# Altium PCB HDsEMG.PcbDoc
Units mil, origin at the board's own origin, x right, y up, seen from the top; angles counter-clockwise.
Board outline 2952.76 x 1220.47 mil, 4 copper layers (Top Layer, Layer 1, Layer 2, Bottom Layer), stack 23.756 mil thick; 159 components, 101 nets, 491 pads, 13 vias.
Unrouted connection lines stored in the file: 254.
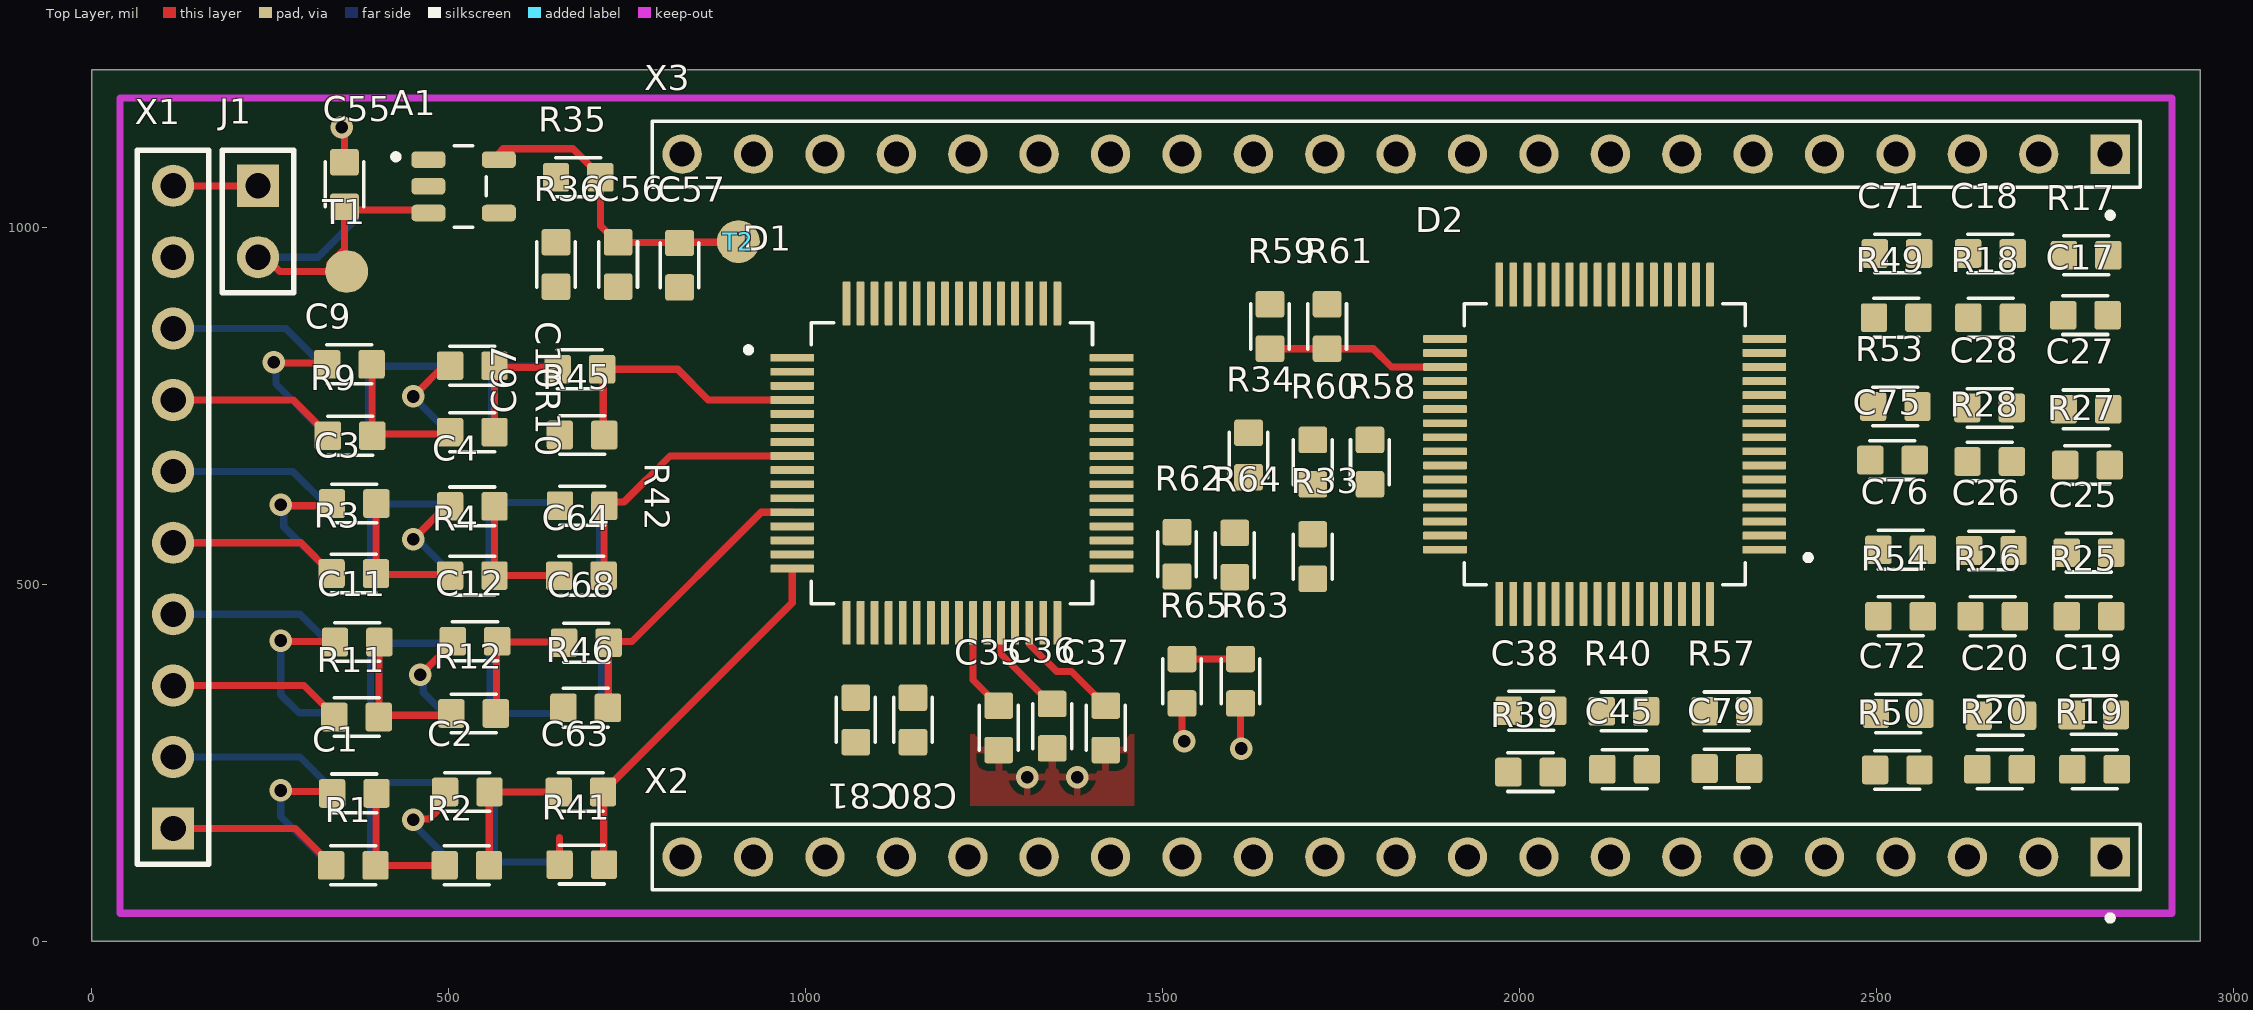
[diagram p0: Top Layer view]
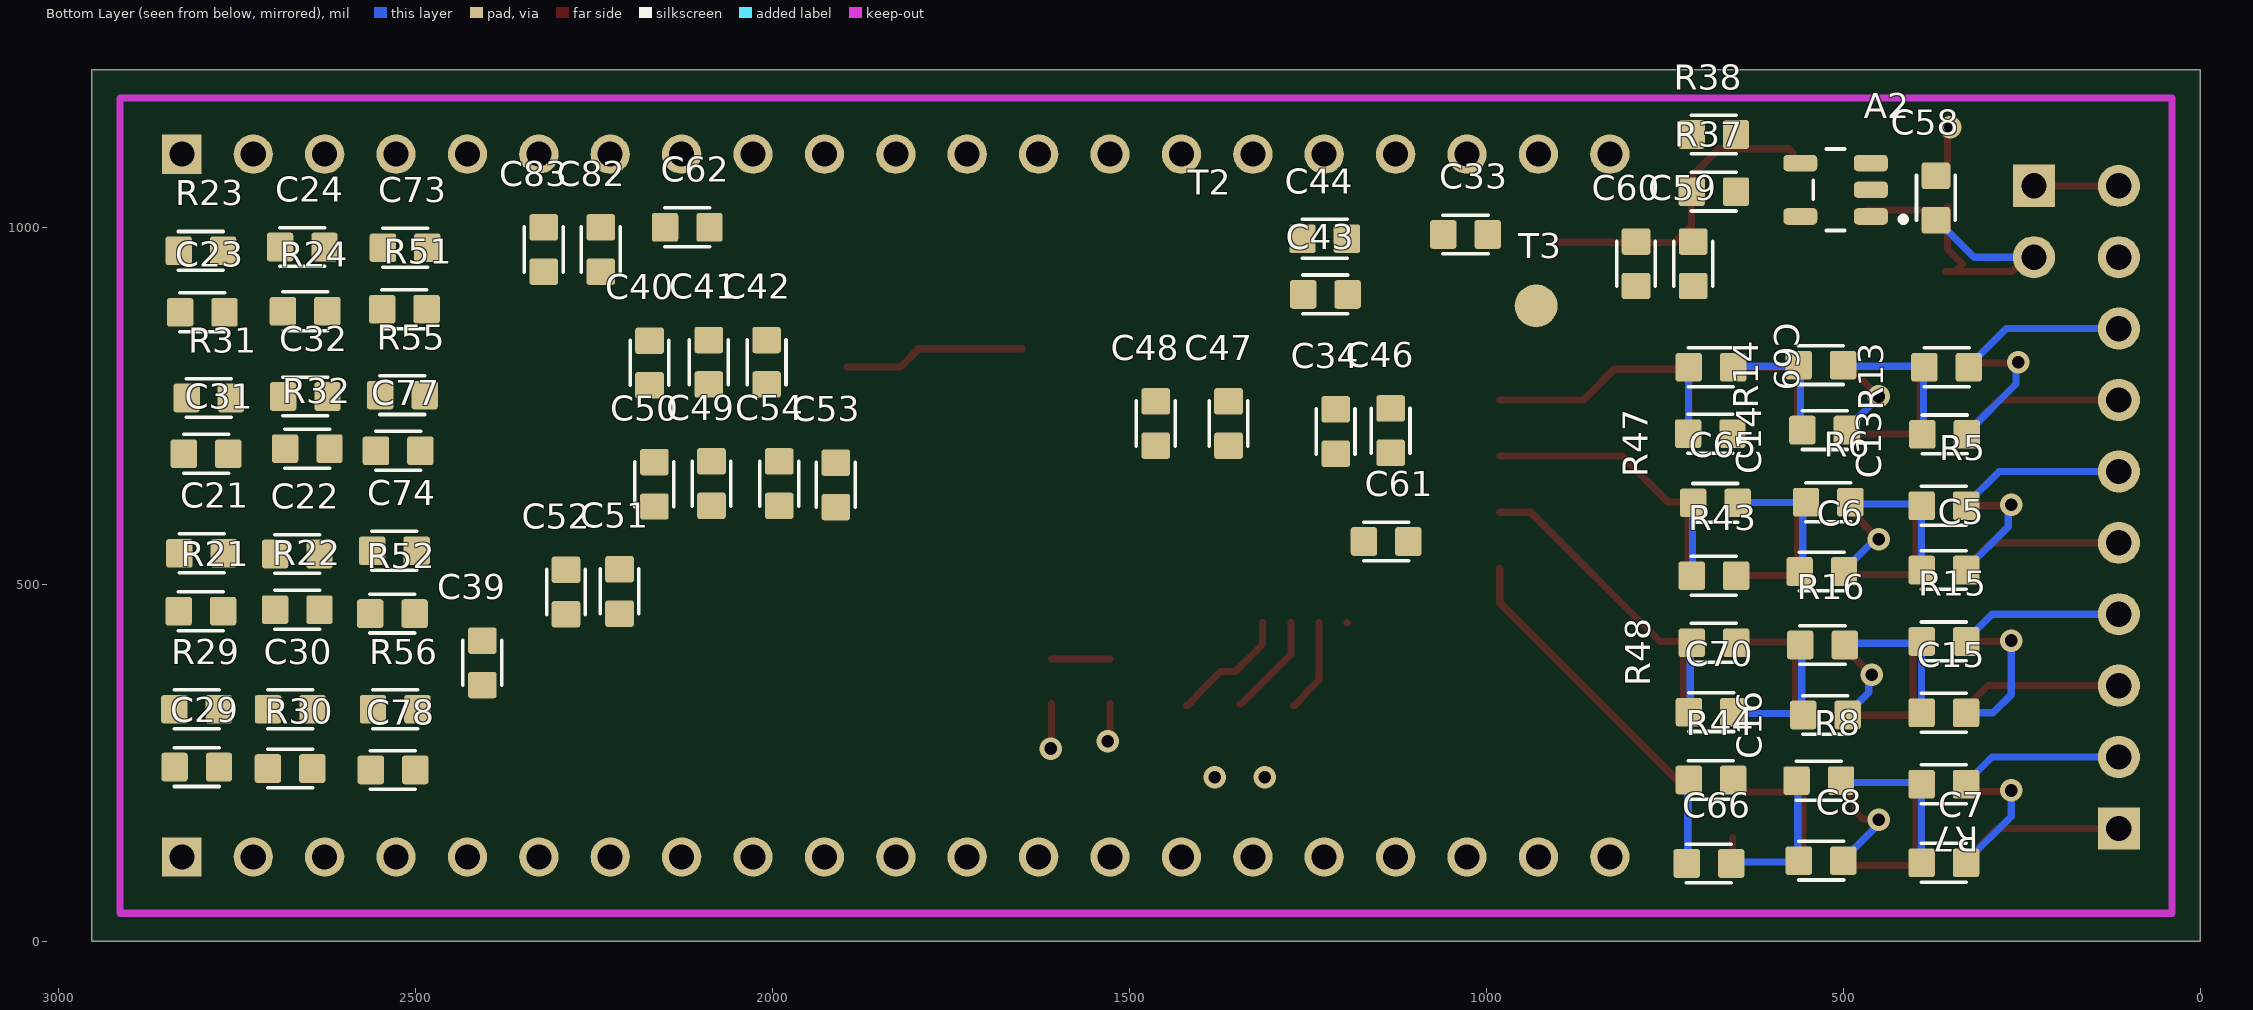
[diagram p1: Bottom Layer view, seen from below]
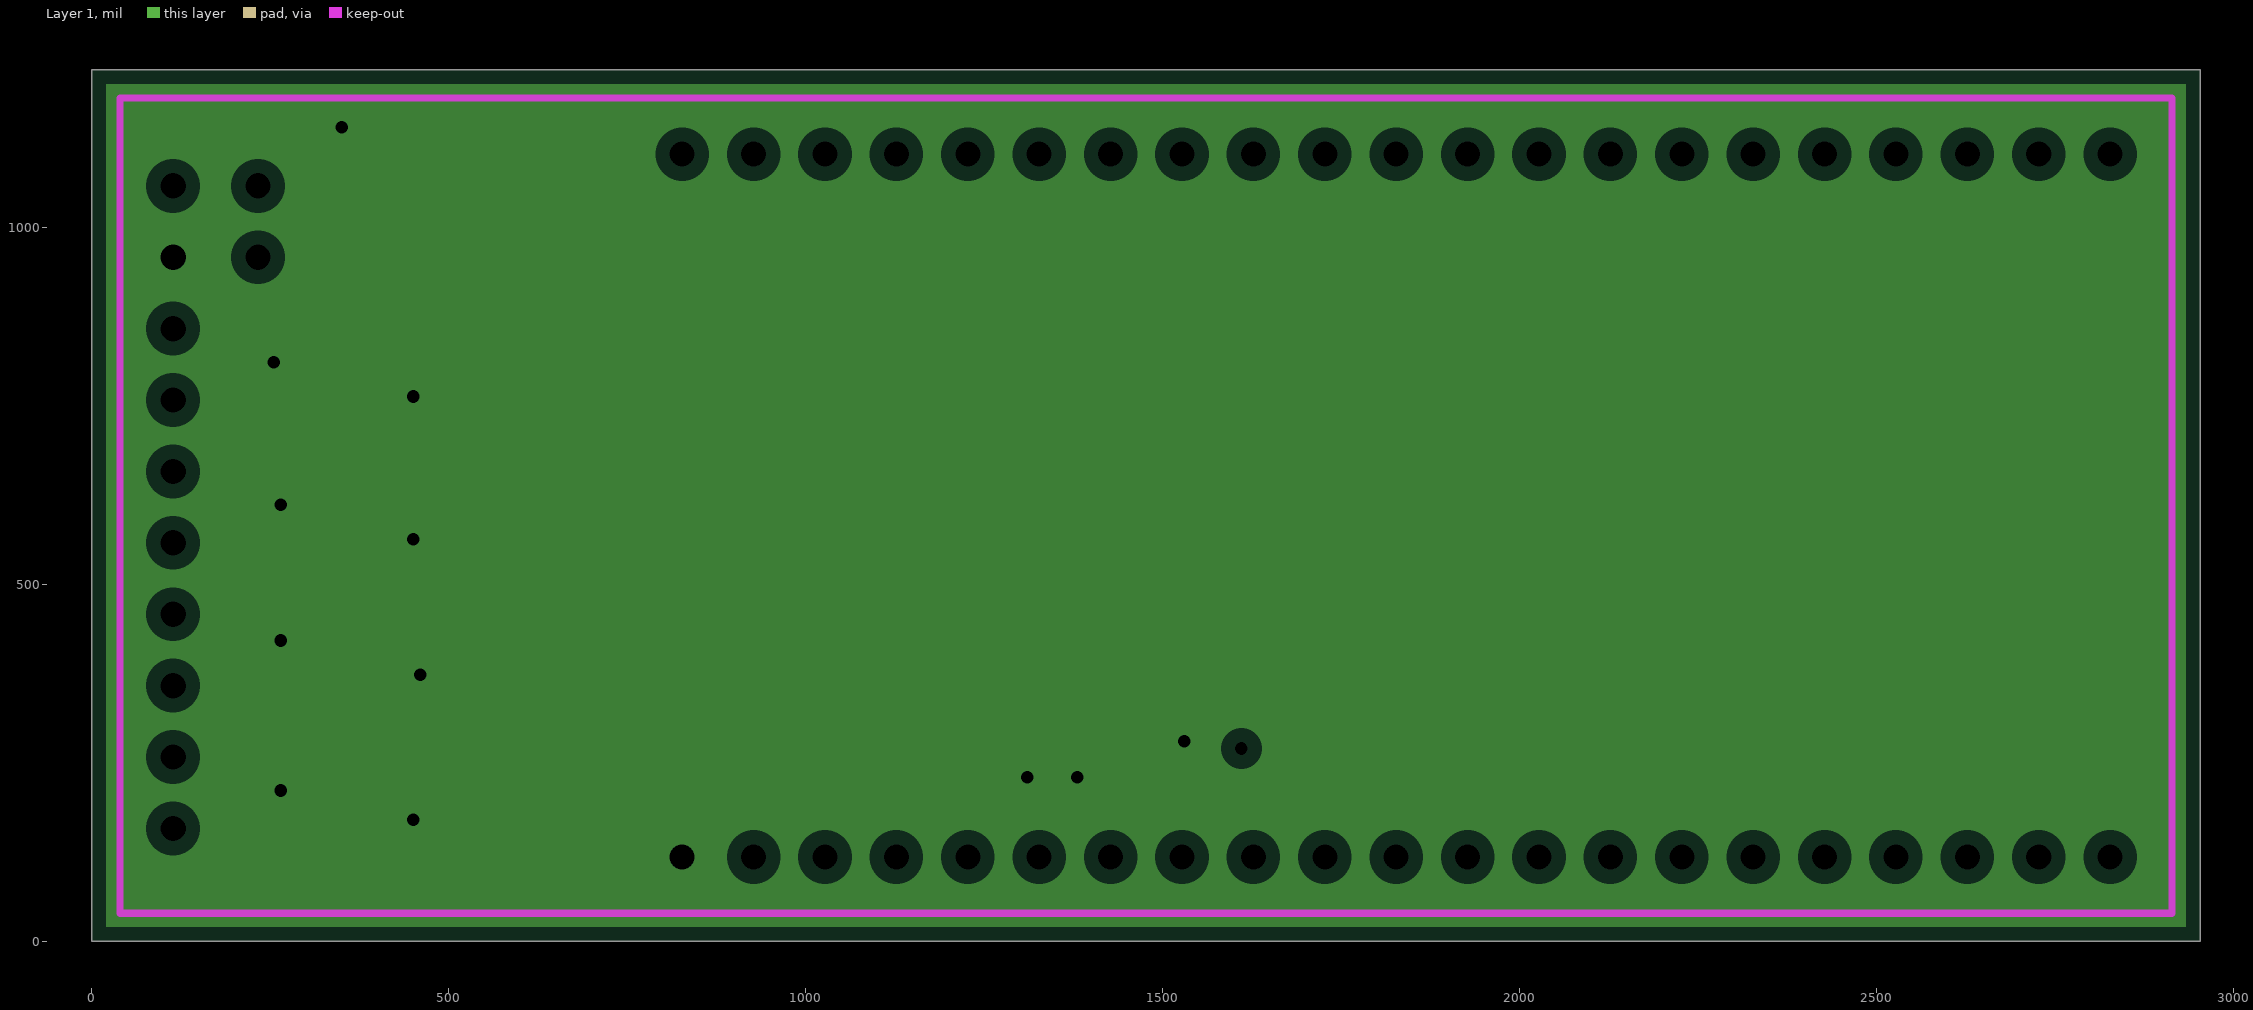
[diagram p2: Layer 1, clearances drawn from the general rule]
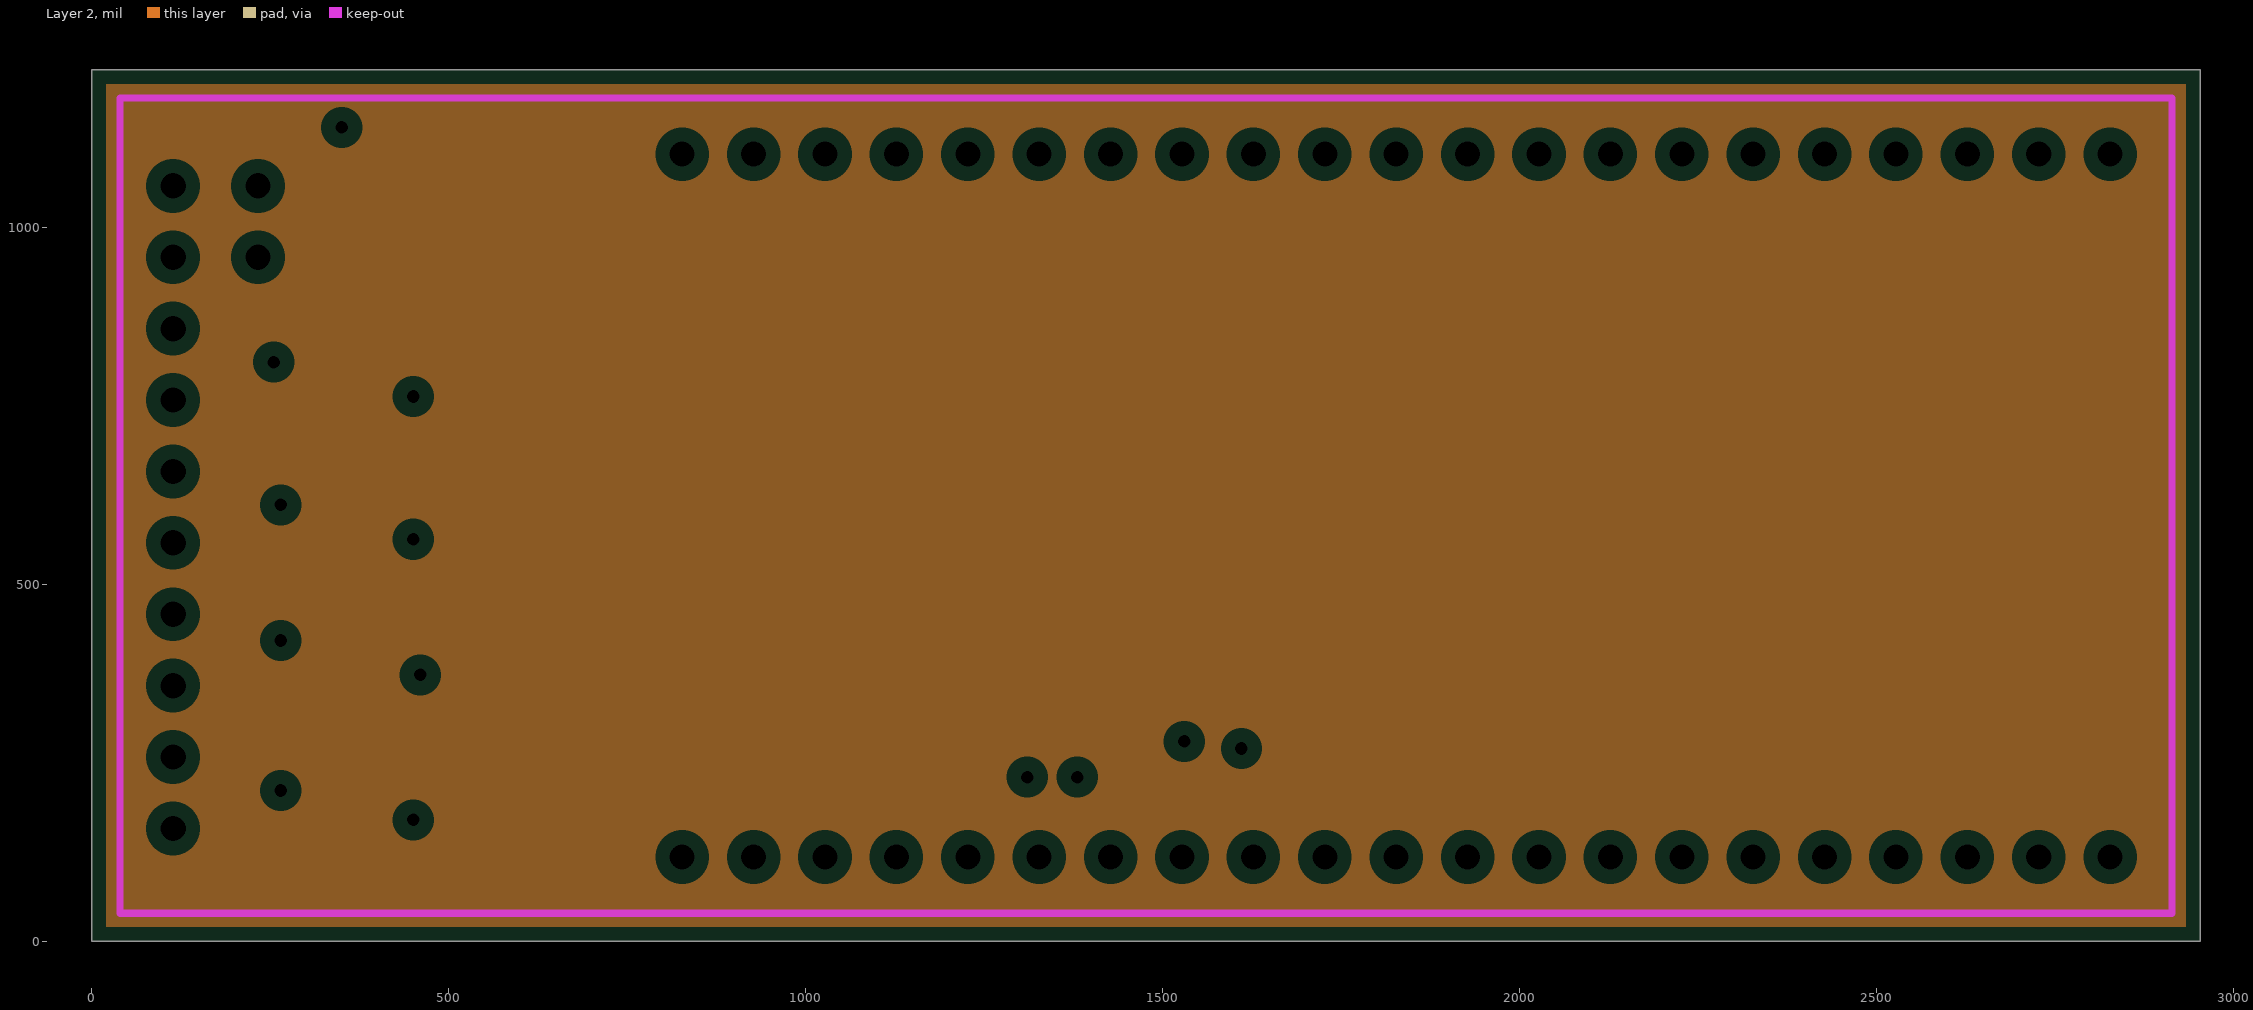
[diagram p3: Layer 2, clearances drawn from the general rule]

## Layer stack, top to bottom
Top Solder: solder mask 0.4, Solder Resist, Dk 3.5
Top Layer: signal copper 1.4
Dielectric 2: prepreg 2.8, PP-006, Dk 4.1
Layer 1: plane copper 1.378, net BAT_GND
Dielectric 1: dielectric 12.6, FR-4, Dk 4.8
Layer 2: plane copper 1.378, net AVDD
Dielectric 3: prepreg 2.8, PP-006, Dk 4.1
Bottom Layer: signal copper 1.4
Bottom Solder: solder mask 0.4, Solder Resist, Dk 3.5

## Board outline
0,0 2952.76,0 2952.76,1220.47 0,1220.47

## Design rules (kind name [scope] priority, off if disabled: settings)
Clearance [All] p1: gap=10 ignorepadtopadclearanceinfootprint=TRUE except(5: Arc-SMDPad Track-SMDPad)
PlaneClearance [All] p1: clearance=20
PlaneConnect [All] p1: planeconnectstyle=Relief reliefexpansion=20 reliefentries=4 reliefconductorwidth=10 reliefairgap=10
PolygonConnect [All] p1: connectstyle=Relief reliefconductorwidth=10 reliefentries=4 polygonreliefangle="90 Angle" airgapwidth=10
RoutingVias [All] p1: holewidth=28 width=50 viastyle="Through Hole" minholewidth=28 minwidth=50 maxholewidth=28 maxwidth=50
SolderMaskExpansion [All] p1: expansion=4 istentingtop=FALSE
Width [All] p1: maxlimit=40 minlimit=10 preferedwidth=10 minimp=50.000000 maximp=50.000000 favimp=50.000000
28 further rules are at their usual default settings.

## Classes and differential pairs
component class "Power supply": A1 A2 C55 C56 C57 C58 C59 C60 J1 R35 R36 R37 R38 T1 T2 T3
component class Input2: C17 C18 C19 C20 C21 C22 C23 C24 C25 C26 C27 C28 C29 C30 C31 C32 C38 C45 C71 C72 C73 C74 C75 C76 C77 C78 C79 R17 R18 R19 R20 R21 R22 R23 R24 R25 R26 R27 R28 R29 R30 R31 R32 R39 R40 R49 R50 R51 R52 R53 R54 R55 R56 R57
component class Input1: C1 C2 C3 C4 C5 C6 C7 C8 C9 C10 C11 C12 C13 C14 C15 C16 C63 C64 C65 C66 C67 C68 C69 C70 R1 R2 R3 R4 R5 R6 R7 R8 R9 R10 R11 R12 R13 R14 R15 R16 R41 R42 R43 R44 R45 R46 R47 R48
component class ESP32: X2 X3
component class ADS1298: C33 C34 C35 C36 C37 C39 C40 C41 C42 C43 C44 C46 C47 C48 C49 C50 C51 C52 C53 C54 C61 C62 C80 C81 C82 C83 D1 D2 R33 R34 R58 R59 R60 R61 R62 R63 R64 R65

## Components (designator, comment, footprint, x,y, rotation, side; value= is the part's Value field where it differs from the comment)
A1 "TPS73201DBVR" SOT95P280X145-5N 520.59,1057.4 r0 top
A2 "TPS73201DBVR" SOT95P280X145-5N 510.59,1052.6 r0 bottom
C1 "47pF" RESC1608X50N 367.56,207.11 r0 top value=100pF
C2 "47pF" RESC1608X50N 525.76,209.11 r0 top value=100pF
C3 "47pF" RESC1608X50N 367.35,613.11 r0 top value=100pF
C4 "47pF" RESC1608X50N 532.76,609.11 r0 top value=100pF
C5 "47pF" RESC1608X50N 358.9,520 r0 bottom value=100pF
C6 "47pF" RESC1608X50N 529.9,518 r0 bottom value=100pF
C7 "47pF" RESC1608X50N 358.9,110 r0 bottom value=100pF
C8 "47pF" RESC1608X50N 530.9,113 r0 bottom value=100pF
C9 "47pF" RESC1608X50N 360.56,808.11 r0 top value=100pF
C10 "47pF" RESC1608X50N 532.76,806.11 r0 top value=100pF
C11 "47pF" RESC1608X50N 371.56,419.11 r0 top value=100pF
C12 "47pF" RESC1608X50N 536.56,420.11 r0 top value=100pF
C13 "47pF" RESC1608X50N 357.9,710 r0 bottom value=100pF
C14 "47pF" RESC1608X50N 525.9,716 r0 bottom value=100pF
C15 "47pF" RESC1608X50N 358.9,320 r0 bottom value=100pF
C16 "47pF" RESC1608X50N 524.9,317 r0 bottom value=100pF
C17 "47pF" RESC1608X50N 2792.1,877 r180 top value=100pF
C18 "47pF" RESC1608X50N 2659.09,963.39 r180 top value=100pF
C19 "47pF" RESC1608X50N 2803.9,317 r180 top value=100pF
C20 "47pF" RESC1608X50N 2673.69,316 r180 top value=100pF
C21 "47pF" RESC1608X50N 2799.09,543.39 r0 bottom value=100pF
C22 "47pF" RESC1608X50N 2665.09,542.39 r0 bottom value=100pF
C23 "47pF" RESC1608X50N 2798.1,881 r180 bottom value=100pF
C24 "47pF" RESC1608X50N 2658.09,972.39 r180 bottom value=100pF
C25 "47pF" RESC1608X50N 2797.09,544.39 r0 top value=100pF
C26 "47pF" RESC1608X50N 2660.3,547.39 r180 top value=100pF
C27 "47pF" RESC1608X50N 2792.9,745 r180 top value=100pF
C28 "47pF" RESC1608X50N 2657.9,747 r180 top value=100pF
C29 "47pF" RESC1608X50N 2805.9,244 r180 bottom value=100pF
C30 "47pF" RESC1608X50N 2674.9,325 r180 bottom value=100pF
C31 "47pF" RESC1608X50N 2792.9,683 r180 bottom value=100pF
C32 "47pF" RESC1608X50N 2653.9,763 r180 bottom value=100pF
C33 "1nF" RESC1608X50N 1028.9,990 r180 bottom value=100pF
C34 "1uF" RESC1608X50N 1210.77,714.01 r270 bottom value=100pF
C35 "1uF" RESC1608X50N 1270,298.9 r270 top value=100pF
C36 "22uF" RESC1608X50N 1345,301.31 r270 top value=100pF
C37 "1uF" RESC1608X50N 1420,298.9 r270 top value=100pF
C38 "47pF" RESC1608X50N 2015.69,323 r0 top value=100pF
C39 "1nF" RESC1608X50N 2405.9,390 r270 bottom value=100pF
C40 "1uF" RESC1608X50N 2171.77,810.01 r270 bottom value=100pF
C41 "22uF" RESC1608X50N 2088.77,811.01 r270 bottom value=100pF
C42 "1uF" RESC1608X50N 2007.77,811.01 r270 bottom value=100pF
C43 "1uF" RESC1608X50N 1225.1,906 r180 bottom value=100pF
C44 "100nF" RESC1608X50N 1226.1,984 r180 bottom value=100pF
C45 "47pF" RESC1608X50N 2146.69,241 r0 top value=100pF
C46 "0.1uF" RESC1608X50N 1133.77,715.21 r270 bottom value=100pF
C47 "1uF" RESC1608X50N 1360.77,725.21 r90 bottom value=100pF
C48 "100nF" RESC1608X50N 1462.77,725.21 r90 bottom value=100pF
C49 "1uF" RESC1608X50N 2085,641.1 r90 bottom value=100pF
C50 "100nF" RESC1608X50N 2165,640.1 r90 bottom value=100pF
C51 "1uF" RESC1608X50N 2213.77,490.01 r90 bottom value=100pF
C52 "0.1uF" RESC1608X50N 2288.77,489.21 r90 bottom value=100pF
C53 "1uF" RESC1608X50N 1910.77,639.21 r90 bottom value=100pF
C54 "100nF" RESC1608X50N 1990,641.1 r90 bottom value=100pF
C55 "1uF" RESC1608X50N 353.77,1060.01 r270 top value=100pF
C56 "1uF" RESC1608X50N 737,947.9 r90 top value=100pF
C57 "10uF" RESC1608X50N 823,946.9 r90 top value=100pF
C58 "1uF" RESC1608X50N 370,1041.1 r270 bottom value=100pF
C59 "1uF" RESC1608X50N 710,948.9 r90 bottom value=100pF
C60 "10uF" RESC1608X50N 790,948.9 r90 bottom value=100pF
C61 "10uF" RESC1608X50N 1140,560 r0 bottom value=100pF
C62 "10uF" RESC1608X50N 2118.9,1000 r180 bottom value=100pF
C63 "330nF" RESC1608X50N 684.76,209.11 r180 top value=100pF
C64 "330nF" RESC1608X50N 685.56,512.11 r180 top value=100pF
C65 "330nF" RESC1608X50N 678.9,614 r180 bottom value=100pF
C66 "330nF" RESC1608X50N 687.9,109 r180 bottom value=100pF
C67 "330nF" RESC1608X50N 683.56,801.11 r180 top value=100pF
C68 "330nF" RESC1608X50N 692.56,418.11 r180 top value=100pF
C69 "330nF" RESC1608X50N 685.1,804 r180 bottom value=100pF
C70 "330nF" RESC1608X50N 684.9,321 r180 bottom value=100pF
C71 "330nF" RESC1608X50N 2528.3,963.39 r0 top value=100pF
C72 "330nF" RESC1608X50N 2529.9,319 r0 top value=100pF
C73 "330nF" RESC1608X50N 2514.09,971.39 r0 bottom value=100pF
C74 "330nF" RESC1608X50N 2529.1,547 r0 bottom value=100pF
C75 "330nF" RESC1608X50N 2521.9,674 r0 top value=100pF
C76 "330nF" RESC1608X50N 2533.3,548.39 r180 top value=100pF
C77 "330nF" RESC1608X50N 2523.9,687 r0 bottom value=100pF
C78 "330nF" RESC1608X50N 2531.1,240 r0 bottom value=100pF
C79 "330nF" RESC1608X50N 2289.9,242 r180 top value=100pF
C80 "1uF" RESC1608X50N 1150,310 r270 top value=100pF
C81 "100nF" RESC1608X50N 1070,310 r270 top value=100pF
C82 "1uF" RESC1608X50N 2240,968.9 r90 bottom value=100pF
C83 "100nF" RESC1608X50N 2320,968.9 r90 bottom value=100pF
D1 "ADS1298IPAG" QFP50P1200X1200X120-64N 1204.56,669.73 r0 top
D2 "ADS1298IPAG" QFP50P1200X1200X120-64N 2118.77,696.11 r180 top
J1 "Header 2" HDR1X2 232.77,1058.11 r270 top
R1 "22k1" CAPC1608X90 366.09,106.39 r0 top value=1K
R2 "10k" CAPC1608X90 525.09,106.39 r0 top value=1K
R3 "22k1" CAPC1608X90 366.76,515.11 r0 top value=1K
R4 "10k" CAPC1608X90 532.76,512.11 r0 top value=1K
R5 "22k1" CAPC1608X90 358.9,610 r0 bottom value=1K
R6 "10k" CAPC1608X90 520.9,615 r0 bottom value=1K
R7 "22k1" CAPC1608X90 358.9,220 r0 bottom value=1K
R8 "10k" CAPC1608X90 534.1,225 r0 bottom value=1K
R9 "22k1" CAPC1608X90 361.56,708.11 r0 top value=1K
R10 "10k" CAPC1608X90 532.76,713.11 r0 top value=1K
R11 "22k1" CAPC1608X90 370.76,314.11 r0 top value=1K
R12 "10k" CAPC1608X90 534.56,319.11 r0 top value=1K
R13 "22k1" CAPC1608X90 355.1,804 r0 bottom value=1K
R14 "10k" CAPC1608X90 531.1,807 r0 bottom value=1K
R15 "22k1" CAPC1608X90 358.9,420 r0 bottom value=1K
R16 "10k" CAPC1608X90 528.9,415 r0 bottom value=1K
R17 "22k1" CAPC1608X90 2793.1,961 r180 top value=1K
R18 "10k" CAPC1608X90 2659.3,873.39 r180 top value=1K
R19 "22k1" CAPC1608X90 2804.9,241 r180 top value=1K
R20 "10k" CAPC1608X90 2671.9,241 r180 top value=1K
R21 "22k1" CAPC1608X90 2800.09,462.39 r0 bottom value=1K
R22 "10k" CAPC1608X90 2665.09,464.39 r0 bottom value=1K
R23 "22k1" CAPC1608X90 2800.1,967 r180 bottom value=1K
R24 "10k" CAPC1608X90 2654.09,882.39 r180 bottom value=1K
R25 "22k1" CAPC1608X90 2797.09,455.39 r180 top value=1K
R26 "10k" CAPC1608X90 2662.3,455.39 r180 top value=1K
R27 "22k1" CAPC1608X90 2794.9,667 r180 top value=1K
R28 "10k" CAPC1608X90 2658.1,672 r180 top value=1K
R29 "22k1" CAPC1608X90 2806.1,325 r180 bottom value=1K
R30 "10k" CAPC1608X90 2675.1,242 r180 bottom value=1K
R31 "22k1" CAPC1608X90 2789.1,761 r180 bottom value=1K
R32 "10k" CAPC1608X90 2651.1,690 r180 bottom value=1K
R33 "10k" CAPC1608X90 1710,538.9 r90 top value=1K
R34 "10k" CAPC1608X90 1620,681.1 r90 top value=1K
R35 "47k7" CAPC1608X90 681.1,1070 r0 top value=1K
R36 "32k" CAPC1608X90 650,947.9 r90 top value=1K
R37 "55k7" CAPC1608X90 681.1,1050 r0 bottom value=1K
R38 "32k" CAPC1608X90 681.1,1130 r180 bottom value=1K
R39 "22k1" CAPC1608X90 2014.9,237 r0 top value=1K
R40 "10k" CAPC1608X90 2145.69,322 r0 top value=1K
R41 "47k" CAPC1608X90 686.09,107.39 r0 top value=1K
R42 "47k" CAPC1608X90 686.76,610.11 r0 top value=1K
R43 "47k" CAPC1608X90 680.9,512 r0 bottom value=1K
R44 "47k" CAPC1608X90 685.1,226 r0 bottom value=1K
R45 "47k" CAPC1608X90 686.56,709.11 r0 top value=1K
R46 "47k" CAPC1608X90 691.56,327.11 r0 top value=1K
R47 "47k" CAPC1608X90 686,711 r0 bottom value=1K
R48 "47k" CAPC1608X90 680.9,418 r0 bottom value=1K
R49 "47k" CAPC1608X90 2527.09,873.39 r180 top value=1K
R50 "47k" CAPC1608X90 2528.69,240 r180 top value=1K
R51 "47k" CAPC1608X90 2515.09,885.39 r180 bottom value=1K
R52 "47k" CAPC1608X90 2531.9,459 r180 bottom value=1K
R53 "47k" CAPC1608X90 2525.9,749 r180 top value=1K
R54 "47k" CAPC1608X90 2533.3,455.39 r0 top value=1K
R55 "47k" CAPC1608X90 2517.9,765 r180 bottom value=1K
R56 "47k" CAPC1608X90 2527.9,325 r180 bottom value=1K
R57 "47k" CAPC1608X90 2289.9,322 r0 top value=1K
R58 "10k" CAPC1608X90 1790,671.1 r270 top value=1K
R59 "10k" CAPC1608X90 1650,861.1 r90 top value=1K
R60 "10k" CAPC1608X90 1710,671.1 r90 top value=1K
R61 "10k" CAPC1608X90 1730,861.1 r270 top value=1K
R62 "10k" CAPC1608X90 1519.77,542.01 r90 top value=1K
R63 "10k" CAPC1608X90 1608.77,364.21 r270 top value=1K
R64 "10k" CAPC1608X90 1600.77,541.01 r270 top value=1K
R65 "10k" CAPC1608X90 1526.77,364.21 r90 top value=1K
T1 "TP1" PCBComponent_1#1 356.77,938.11 r0 top
T2 "TP2" PCBComponent_1#2 1393,980 r180 bottom
T3 "TP3" PCBComponent_1#1 930,890 r180 bottom
X1 "Header 10" HDR1X10 113.77,158.11 r90 top
X2 "7-2267062-1" TE_7-2267062-1 1826.77,118.11 r180 top
X3 "7-2267062-1" TE_7-2267062-1 1826.77,1102.36 r180 top

## Footprints (in the part's own frame and the unit in brackets; to place one, negate y for a bottom-side part, rotate by r counter-clockwise, add the part's x,y. Pads: shape width x height; smd on the part's side, far side on the other; paste and mask are expansions set on the pad)
CAPC1608X90 [mm]
  rrect20% 0.94x1.02 smd: 1(-0.79,0) 2(0.79,0)
  silkscreen extent -0.8,-0.69 0.8,0.69
HDR1X2 [mm] "Connector; Header; 2 Position"
  rect 1.5x1.5 hole 0.9: 1(0,0)
  round 1.5 hole 0.9: 2(2.54,0)
  silkscreen extent -1.27,-1.27 3.81,1.27
HDR1X10 [mm] "Connector; Header; 10 Position"
  rect 1.5x1.5 hole 0.9: 1(0,0)
  round 1.5 hole 0.9: 2(2.54,0) 3(5.08,0) 4(7.62,0) 5(10.16,0) 6(12.7,0) 7(15.24,0) 8(17.78,0) 9(20.32,0) 10(22.86,0)
  silkscreen extent -1.27,-1.27 24.13,1.27
PCBComponent_1#1 [mil]
  round 60 smd: 1(0,0)
PCBComponent_1#2 [mil]
  round 60 smd far side: 1(487.49,0)
QFP50P1200X1200X120-64N [mm]
  rrect25% 1.56x0.28 smd: 1(-5.68,3.75) 2(-5.68,3.25) 3(-5.68,2.75) 4(-5.68,2.25) 5(-5.68,1.75) 6(-5.68,1.25) 7(-5.68,0.75) 8(-5.68,0.25) 9(-5.68,-0.25) 10(-5.68,-0.75) 11(-5.68,-1.25) 12(-5.68,-1.75) 13(-5.68,-2.25) 14(-5.68,-2.75) 15(-5.68,-3.25) 16(-5.68,-3.75) 33(5.68,-3.75) 34(5.68,-3.25) 35(5.68,-2.75) 36(5.68,-2.25) 37(5.68,-1.75) 38(5.68,-1.25) 39(5.68,-0.75) 40(5.68,-0.25) 41(5.68,0.25) 42(5.68,0.75) 43(5.68,1.25) 44(5.68,1.75) 45(5.68,2.25) 46(5.68,2.75) 47(5.68,3.25) 48(5.68,3.75)
  rrect25% 0.28x1.56 smd: 17(-3.75,-5.68) 18(-3.25,-5.68) 19(-2.75,-5.68) 20(-2.25,-5.68) 21(-1.75,-5.68) 22(-1.25,-5.68) 23(-0.75,-5.68) 24(-0.25,-5.68) 25(0.25,-5.68) 26(0.75,-5.68) 27(1.25,-5.68) 28(1.75,-5.68) 29(2.25,-5.68) 30(2.75,-5.68) 31(3.25,-5.68) 32(3.75,-5.68) 49(3.75,5.68) 50(3.25,5.68) 51(2.75,5.68) 52(2.25,5.68) 53(1.75,5.68) 54(1.25,5.68) 55(0.75,5.68) 56(0.25,5.68) 57(-0.25,5.68) 58(-0.75,5.68) 59(-1.25,5.68) 60(-1.75,5.68) 61(-2.25,5.68) 62(-2.75,5.68) 63(-3.25,5.68) 64(-3.75,5.68)
  silkscreen extent -7.34,-5 5,5
RESC1608X50N [mm]
  rrect20% 0.94x1.02 smd: 1(-0.79,0) 2(0.79,0)
  silkscreen extent -0.8,-0.69 0.8,0.69
SOT95P280X145-5N [mm]
  rrect50% 1.21x0.59 smd: 1(-1.255,0.95) 2(-1.255,0) 3(-1.255,-0.95) 4(1.255,-0.95) 5(1.255,0.95)
  silkscreen extent -2.51,-1.45 0.8,1.45, body extent -1.4,-1.45 1.4,1.45, height 1.45
TE_7-2267062-1 [mm]
  rect 1.398x1.398 hole 0.89: 1(-25.4,0)
  round 1.398 hole 0.89: 2(-22.86,0) 3(-20.32,0) 4(-17.78,0) 5(-15.24,0) 6(-12.7,0) 7(-10.16,0) 8(-7.62,0) 9(-5.08,0) 10(-2.54,0) 11(0,0) 12(2.54,0) 13(5.08,0) 14(7.62,0) 15(10.16,0) 16(12.7,0) 17(15.24,0) 18(17.78,0) 19(20.32,0) 20(22.86,0) 21(25.4,0)
  silkscreen extent -26.47,-1.17 26.47,2.27, body extent -26.47,-1.17 26.47,1.17, height 8.08

## Part data
A1 A2: "250-mA, high-accuracy, ultra-low-dropout voltage regulator with reverse current protection & enable 5-SOT-23 -40 to 125", Package="SOT-23-5 Texas Instruments", Arrow_Electronics-Purchase-URL=https://snapeda.com/shop?store=Arrow+Electronics&id=76590, DigiKey-Purchase-URL=https://snapeda.com/shop?store=DigiKey&id=76590, MF="Texas Instruments", Mouser-Purchase-URL=https://snapeda.com/shop?store=Mouser&id=76590, MP=TPS73201DBVR, SnapEDA_Link=https://www.snapeda.com/parts/TPS73201DBVR/Texas%20Instruments/view-part/76590/?ref=snap, Texas_Instruments-Purchase-URL=https://snapeda.com/shop?store=Texas+Instruments&id=76590
C1 C2 C3 C4 C5 C6 C7 C8 C9 C10 C11 C12 C13 C14 C15 C16 C17 C18 C19 C20 C21 C22 C23 C24 C25 C26 C27 C28 C29 C30 C31 C32 C33 C34 C35 C36 C37 C38 C39 C40 C41 C42 C43 C44 C45 C46 C47 C48 C49 C50 C51 C52 C53 C54 C55 C56 C57 C58 C59 C60 C61 C62 C63 C64 C65 C66 C67 C68 C69 C70 C71 C72 C73 C74 C75 C76 C77 C78 C79 C80 C81 C82 C83: library part Cap, "Capacitor", LatestRevisionDate=17-Jul-2002, LatestRevisionNote="Re-released for DXP Platform.", PackageDescription="Radial Cap, Thru-Hole; 2 Leads; 0.3 in Pin Spacing", PackageReference=RAD-0.3, Published=8-Jun-2000, Publisher="Altium Limited"
D1 D2: "Integrated Circuit", Manufacturer_Name="Texas Instruments", Mouser Part Number=595-ADS1298IPAG, Arrow Part Number=ADS1298IPAG, Arrow Price/Stock=https://www.arrow.com/en/products/ads1298ipag/texas-instruments, Datasheet Link=http://www.ti.com/lit/ds/symlink/ads1298.pdf, Height=1.2mm, Manufacturer_Part_Number=ADS1298IPAG, Mouser Price/Stock=https://www.mouser.co.uk/ProductDetail/Texas-Instruments/ADS1298IPAG?qs=Z6FgPJT5dDR3VNlC6H4EKg%3D%3D
J1: "Header, 2-Pin", LatestRevisionDate=17-Jul-2002, LatestRevisionNote="Re-released for DXP Platform.", Publisher="Altium Limited"
R1 R2 R3 R4 R5 R6 R7 R8 R9 R10 R11 R12 R13 R14 R15 R16 R17 R18 R19 R20 R21 R22 R23 R24 R25 R26 R27 R28 R29 R30 R31 R32 R33 R34 R35 R36 R37 R38 R39 R40 R41 R42 R43 R44 R45 R46 R47 R48 R49 R50 R51 R52 R53 R54 R55 R56 R57 R58 R59 R60 R61 R62 R63 R64 R65: library part Res2, "Resistor", LatestRevisionDate=17-Jul-2002, LatestRevisionNote="Re-released for DXP Platform.", PackageDescription="Axial Device, Thru-Hole; 2 Leads; 0.4 in Pin Spacing", PackageReference=AXIAL-0.4, Published=8-Jun-2000, Publisher="Altium Limited"
T1 T2 T3: library part Component_1
X1: "Header, 10-Pin", LatestRevisionDate=17-Jul-2002, LatestRevisionNote="Re-released for DXP Platform.", Publisher="Altium Limited"
X2 X3: Package=None, Availability=Unavailable, MP=7-2267062-1, Price=None

## Via types
v1: diameter 31.5, hole 17.72, Top Layer to Bottom Layer, 13 vias

## Nets (pads, with @x,y where several pads share a name; then routed paths per layer and width w, separated by ;. In a path a pad name is that pad's centre, name@x,y a point inside that pad or via, vN(x,y) a via of type N, cw(c..) or ccw(c..) an arc to the next point about the centre after c; other vN are vias at no path point)
/CS1: D1.39 R34.1 X3.15
/CS2: D2.39 R33.1 X2.12
/PWDN1: D1.35 R63.1 R65.2 | length 82
  Top Layer w10: R65.2 R63.1
/PWDN2: D2.35 R59.1 R61.2 | length 255.8
  Top Layer w10: R59.1 R61.2 1794.7,830 1820.33,804.38 D2.35
/RESET1: D1.36 R62.1 R64.2
/RESET2: D2.36 R58.1 R60.2
AVDD: A1.5 C43.1 C44.1 C49.1 C50.1 C56.2 C57.2 C80.1 C81.1 C82.1 C83.1 D1.19 D1.21 D1.22 D1.54 D1.56 D1.59 D2.19 D2.21 D2.22 D2.54 D2.56 D2.59 R35.2 T2.1 | length 443.4
  Top Layer w10: A1.5 570,1104.14 575.86,1110 673.78,1110 712.2,1071.57 R35.2 712.2,1002.22 735.43,979 C56.2 737.5,978.5 822.5,978.5 C57.2 824,979 904.51,979 T2.1
BAT: J1.1 X1.10 | length 119
  Top Layer w10: X1.10 J1.1
BAT_GND: A1.2 A2.2 C1.1 C2.1 C3.1 C4.1 C5.1 C6.1 C7.1 C8.1 C9.1 C10.1 C11.1 C12.1 C13.1 C14.1 C15.1 C16.1 C17.1 C18.1 C19.1 C20.1 C21.1 C22.1 C23.1 C24.1 C25.1 C26.1 C27.1 C28.1 C29.1 C30.1 C31.1 C32.1 C33.2 C34.2 C35.2 C36.2 C37.2 C38.1 C39.2 C40.2 C41.2 C42.2 C43.2 C44.2 C45.1 C46.2 C49.2 C50.2 C51.2 C52.2 C55.1 C56.1 C57.1 C58.1 C59.1 C60.1 C61.1 C62.1 C80.2 C81.2 C82.2 C83.2 D1.20 D1.23 D1.25 D1.32 D1.33 D1.53 D1.57 D1.58 D2.20 D2.23 D2.25 D2.32 D2.33 D2.53 D2.57 D2.58 R36.1 R38.1 R60.1 R61.1 R64.1 R65.1 X1.9 X2.21 | length 1465.4
  Top Layer w10: v1@255.82,810 C9.1@323.57,810 ; v1(264.57,211.25) 265.82,210 333.57,210 C1.1 ; v1@265.82,420 C11.1@333.57,420 ; v1@265.82,610 C3.1@333.57,610 ; v1(350,1140) 350,1150 353.77,1146.23 C55.1 ; v1(450,170) 451.22,171.22 472.26,171.22 483.59,182.55 483.59,198.04 C2.1 ; v1(450,563.08) C4.1@495.46,608.54 ; v1(450,763.08) C10.1@495.46,808.54 ; v1(460,373.08) 505.46,418.54 C12.1 ; v1@1526.77,286.77 R65.1
  Bottom Layer w10: v1(254.57,811.25) 257.87,807.95 257.87,780.5 326.8,711.57 C13.1 ; v1(264.57,211.25) 264.57,174.8 327.8,111.57 C7.1 ; v1(264.57,421.25) 264.57,345.43 290,320 C15.1 ; v1(264.57,611.25) 268.68,607.14 268.68,580.69 327.8,521.57 C5.1 ; v1(450,170) 450,164.37 499.8,114.57 C8.1 ; v1(450,563.08) 455.29,563.08 498.8,519.57 C6.1 ; v1(450,763.08) 450,762.37 494.8,717.57 C14.1 ; v1(460,373.08) 464.11,368.97 464.11,348.26 493.8,318.57 C16.1
  other v1: 1310,230 1380,230 1530,280
DGND: C47.2 C48.2 C53.2 C54.2 D1.31 D1.41 D1.49 D1.51 D1.52 D2.31 D2.41 D2.49 D2.51 D2.52
DIN: D1.34 D2.34 X3.14
DOUT: D1.43 D2.43 X3.12
DRDY: D1.47 X3.21
DVDD: A2.5 C47.1 C48.1 C53.1 C54.1 C59.2 C60.2 D1.48 D1.50 D2.48 D2.50 R33.2 R34.2 R37.2 R58.2 R59.2 R62.2 R63.2 T3.1 | length 51.9
  Top Layer w10: v1@1608.77,281.23 R63.2
  other v1: 1610,270
ESP32_5V_pin: A1.1 A1.3 A2.1 A2.3 C55.2 C58.2 J1.2 T1.1 X2.20 | length 516
  Top Layer w10: J1.2 243.16,958.11 263.16,938.11 T1.1 ; T1.1@343.24,938.11 332.72,948.63 353.77,969.69 C55.2 358.22,1024.45 466.73,1024.45 A1.3
  Bottom Layer w10: J1.2 316.54,958.11 368.43,1010 C58.2
IN1: C63.1 D1.16 R41.2 | length 526
  Top Layer w10: R41.2 716.53,108.06 716.53,208.44 C63.1 715.87,210.69 729.37,224.19 730.94,224.19 980.94,474.18 D1.16
IN1C: R1.1 X1.1 | length 243.6
  Top Layer w10: X1.1 284.85,158.11 334.99,107.97 R1.1
IN2: C66.1 D1.14 R44.2 | length 118.2
  Bottom Layer w10: R44.2 717.6,224.6 717.6,110.4 C66.1
IN2C: R7.1 X1.2 | length 230.7
  Bottom Layer w10: X1.2 291.26,258.11 327.8,221.57 R7.1
IN3: C68.1 D1.12 R46.2 | length 424.4
  Top Layer w10: R46.2 723.16,327.61 723.16,417.61 725.55,420 756.64,420 937.47,600.83 D1.12
IN3C: R11.1 X1.3 | length 245
  Top Layer w10: X1.3 297.24,358.11 339.66,315.69 R11.1
IN4: C70.1 D1.10 R48.2 | length 98.7
  Bottom Layer w10: R48.2 714,416 714,323 C70.1
IN4C: R15.1 X1.4 | length 230.7
  Bottom Layer w10: X1.4 291.26,458.11 327.8,421.57 R15.1
IN5: C64.1 D1.8 R42.2 | length 390.3
  Top Layer w10: C64.1 717.26,512.71 717.26,609.51 723.27,615.51 745.51,615.51 809.57,679.57 D1.8
IN5C: R3.1 X1.5 | length 239.7
  Top Layer w10: X1.5 292.66,558.11 R3.1
IN6: C65.1 D1.6 R43.2 | length 102.8
  Bottom Layer w10: C65.1 711,613 711,513 R43.2
IN6C: R5.1 X1.6 | length 234.9
  Bottom Layer w10: X1.6 281.26,658.11 327.8,611.57 R5.1
IN7: C67.1 D1.4 R45.2 | length 377.2
  Top Layer w10: R45.2 716.16,710.61 716.16,799.61 C67.1 820.56,801.11 863.35,758.31 D1.4
IN7C: R9.1 X1.7 | length 238.3
  Top Layer w10: X1.7 282.03,758.11 330.46,709.69 R9.1
IN8: C69.1 D1.2 R47.2 | length 93.4
  Bottom Layer w10: C69.1 716.65,803.55 716.65,711.45 R47.2
IN8C: R13.1 X1.8 | length 233.6
  Bottom Layer w10: X1.8 271.46,858.11 324,805.57 R13.1
IN9: C71.1 D2.16 R49.2
IN9C: R17.1 X3.4
IN10: C73.1 D2.14 R51.2
IN10C: R23.1 X3.3
IN11: C75.1 D2.12 R53.2
IN11C: R27.1 X3.2
IN12: C77.1 D2.10 R55.2
IN12C: R31.1 X3.1
IN13: C72.1 D2.8 R50.2
IN13C: R19.1 X2.2
IN14: C74.1 D2.6 R52.2
IN14C: R21.1 X2.3
IN15: C76.1 D2.4 R54.2
IN15C: R25.1 X2.4
IN16: C78.1 D2.2 R56.2
IN16C: R29.1 X2.1
NetA1_4: A1.4 R35.1 R36.2
NetA2_4: A2.4 R37.1 R38.2
NetC1_2: C1.2 R1.2 R2.1 | length 198.1
  Top Layer w10: C1.2 397.93,206.38 397.93,107.13 R1.2 R2.1
NetC2_2: C2.2 C63.2 R2.2 | length 199.8
  Top Layer w10: R2.2 556.53,106.73 556.53,208.78 C2.2 C63.2
NetC3_2: C3.2 R3.2 R4.1 | length 203.3
  Top Layer w10: C3.2 398.16,612.82 398.16,515.41 R3.2 399.37,513.61 500.16,513.61 R4.1
NetC4_2: C4.2 C64.2 R4.2 | length 187.6
  Top Layer w10: C4.2 R4.2 C64.2
NetC5_2: C5.2 R5.2 R6.1 | length 191.9
  Bottom Layer w10: C5.2 R5.2 392.5,612.5 487.3,612.5 R6.1
NetC6_2: C6.2 C65.2 R6.2 | length 190.6
  Bottom Layer w10: R6.2 552.5,614.5 647.3,614.5 C65.2 ; R6.2@556.5,610.5 556.5,522.5 C6.2
NetC7_2: C7.2 R7.2 R8.1 | length 225.1
  Bottom Layer w10: C7.2 R7.2 392.5,222.5 500.5,222.5 R8.1
NetC8_2: C8.2 C66.2 R8.2 | length 209.8
  Bottom Layer w10: R8.2 563.6,223.4 563.6,114.6 C8.2 564,111 654.8,111 C66.2
NetC9_2: C9.2 R9.2 R10.1 | length 211.5
  Top Layer w10: C9.2 392.16,807.61 392.16,708.61 R9.2 395.16,710.61 499.16,710.61 R10.1
NetC10_2: C10.2 C67.2 R10.2 | length 183.7
  Top Layer w10: R10.2 C10.2 566.37,803.61 649.96,803.61 C67.2
NetC11_2: C11.2 R11.2 R12.1 | length 208.4
  Top Layer w10: R11.2 R11.2@402.26,314.51 ; C11.2 402.26,418.71 R11.2@402.26,314.51 ; R12.1 500.96,316.61 404.37,316.61 R11.2@402.26,314.51
NetC12_2: C12.2 C68.2 R12.2 | length 196.5
  Top Layer w10: R12.2 566.66,320.11 566.66,419.11 C12.2 568.66,419.11 660.46,419.11 C68.2
NetC13_2: C13.2 R13.2 R14.1 | length 210.2
  Bottom Layer w10: C13.2 387.6,711.4 387.6,802.6 R13.2 387.7,805.5 498.5,805.5 R14.1
NetC14_2: C14.2 C69.2 R14.2 | length 186.2
  Bottom Layer w10: C14.2 559.6,718.6 559.6,804.4 R14.2 563.7,805.5 652.5,805.5 C69.2
NetC15_2: C15.2 R15.2 R16.1 | length 209.9
  Bottom Layer w10: C15.2 R15.2 392.5,417.5 495.3,417.5 R16.1
NetC16_2: C16.2 C70.2 R16.2 | length 196.3
  Bottom Layer w10: C16.2 C16.2@558,319 ; R16.2 558,413 C16.2@558,319 ; C70.2 651.8,319 C16.2@558,319
NetC17_2: C17.2 R17.2 R18.1
NetC18_2: C18.2 C71.2 R18.2
NetC19_2: C19.2 R19.2 R20.1
NetC20_2: C20.2 C72.2 R20.2
NetC21_2: C21.2 R21.2 R22.1
NetC22_2: C22.2 C74.2 R22.2
NetC23_2: C23.2 R23.2 R24.1
NetC24_2: C24.2 C73.2 R24.2
NetC25_2: C25.2 R25.2 R26.1
NetC26_2: C26.2 C76.2 R26.2
NetC27_2: C27.2 R27.2 R28.1
NetC28_2: C28.2 C75.2 R28.2
NetC29_2: C29.2 R29.2 R30.1
NetC30_2: C30.2 C78.2 R30.2
NetC31_2: C31.2 R31.2 R32.1
NetC32_2: C32.2 C77.2 R32.2
NetC33_1: C33.1 D1.64
NetC34_1: C34.1 C46.1 D1.55
NetC35_1: C35.1 D1.26 | length 131.9
  Top Layer w10: D1.26 1234.09,365.91 1254.92,345.08 1254.92,343.5 1268.43,330 C35.1
NetC36_1: C36.1 D1.28 | length 144.3
  Top Layer w10: D1.28 1273.46,402.38 1343.43,332.41 C36.1
NetC37_1: C37.1 D1.30 | length 173.7
  Top Layer w10: D1.30 1313.34,445.6 1313.34,415.73 1351.28,377.79 1372.21,377.79 1404.92,345.08 1404.92,343.5 1418.43,330 C37.1
NetC38_2: C38.2 R39.2 R40.1
NetC39_1: C39.1 D2.64
NetC40_1: C40.1 D2.26
NetC41_1: C41.1 D2.28
NetC42_1: C42.1 D2.30
NetC45_2: C45.2 C79.2 R40.2
NetC51_1: C51.1 C52.1 D2.55
NetC61_2: C61.2 D1.24 | length 0.7
  Top Layer w10: D1.24@1194.2,445.6 D1.24
NetC62_2: C62.2 D2.24
REF: C79.1 D1.1 D1.3 D1.5 D1.7 D1.9 D1.11 D1.13 D1.15 D2.1 D2.3 D2.5 D2.7 D2.9 D2.11 D2.13 D2.15 R57.2
REFC: R39.1 X2.5
RLDOUT: D1.62 D1.63 R41.1 R42.1 R43.1 R44.1 R45.1 R46.1 R47.1 R48.1 | length 37.6
  Top Layer w10: R41.1 654.99,145.01
RLDOUT2: D2.62 D2.63 R49.1 R50.1 R51.1 R52.1 R53.1 R54.1 R55.1 R56.1 R57.1
SCLK: D1.40 D2.40 X3.13
START: D1.38 D2.38 X2.15
pads on no net: D1.17 D1.18 D1.27 D1.29 D1.37 D1.42 D1.44 D1.45 D1.46 D1.60 D1.61 D2.17 D2.18 D2.27 D2.29 D2.37 D2.42 D2.44 D2.45 D2.46 D2.47 D2.60 D2.61 X2.6 X2.7 X2.8 X2.9 X2.10 X2.11 X2.13 X2.14 X2.16 X2.17 X2.18 X2.19 X3.5 X3.6 X3.7 X3.8 X3.9 X3.10 X3.11 X3.16 X3.17 X3.18 X3.19 X3.20

## Polygon pours and split planes (outlines as drawn)
no net on Bottom Layer "NONET_L04_P000" (solid, pour order 0): 1470,280
BAT_GND on Top Layer "BAT_GND_L01_P003" (solid, pour order 3): 1230,290 1460,290 1460,190 1230,190
BAT_GND on Layer 1 (split plane): 2932.66,20.1 20.1,20.1 20.1,1200.38 2932.66,1200.38
AVDD on Layer 2 (split plane): 2932.66,20.1 20.1,20.1 20.1,1200.38 2932.66,1200.38

## Keep-outs
Keep-Out Layer:
  lines w10: 39.37,39.37 39.37,1181.1 2913.39,1181.1 2913.39,39.37 39.37,39.37

## Silkscreen, mask and mechanical layers (free items; w line width, h text height)
Mechanical 1:
  the board outline again, w10